# EAGLE board untitled (EAGLE 5.01), part 1 of 2
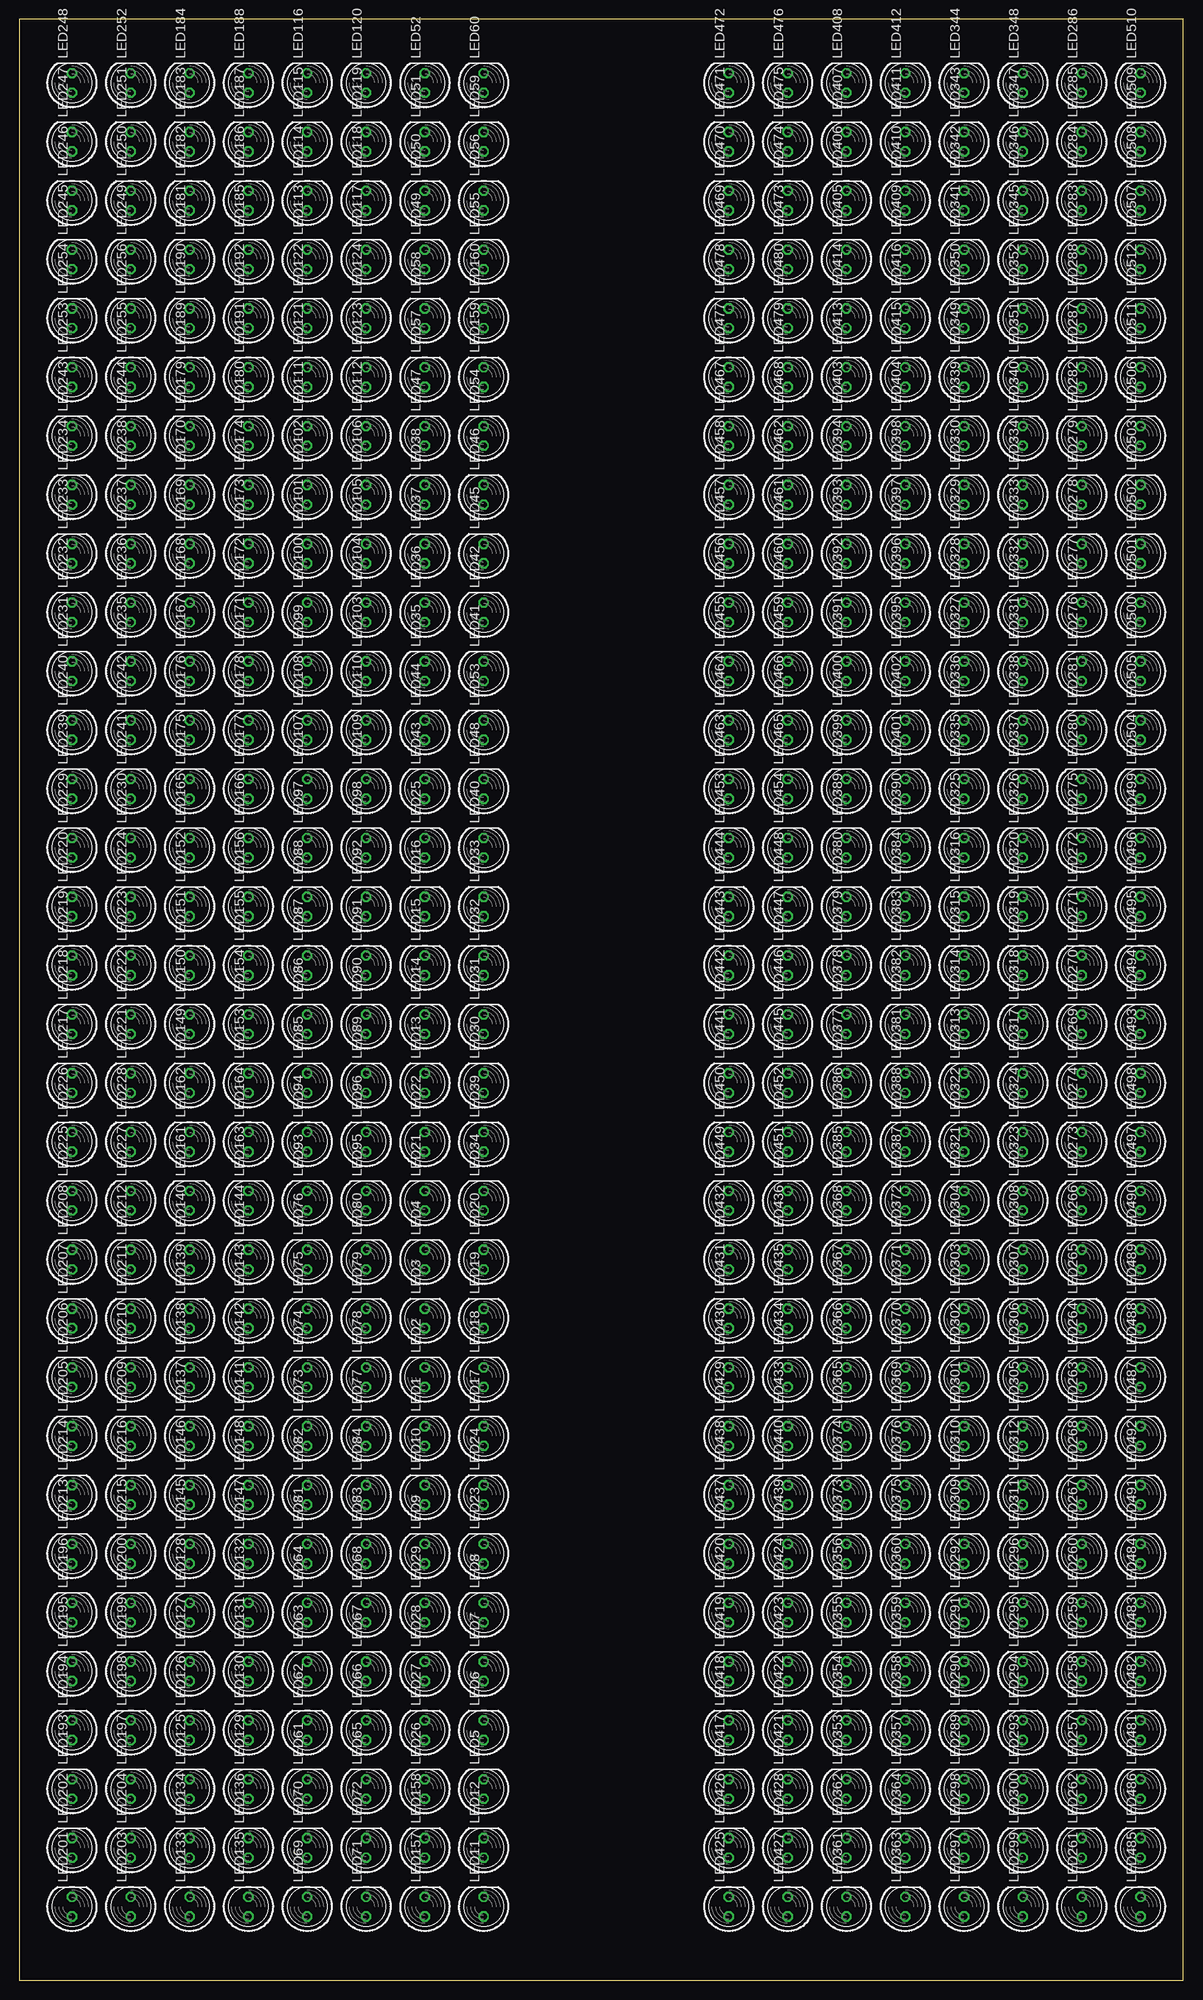
[diagram p0: board, top side]
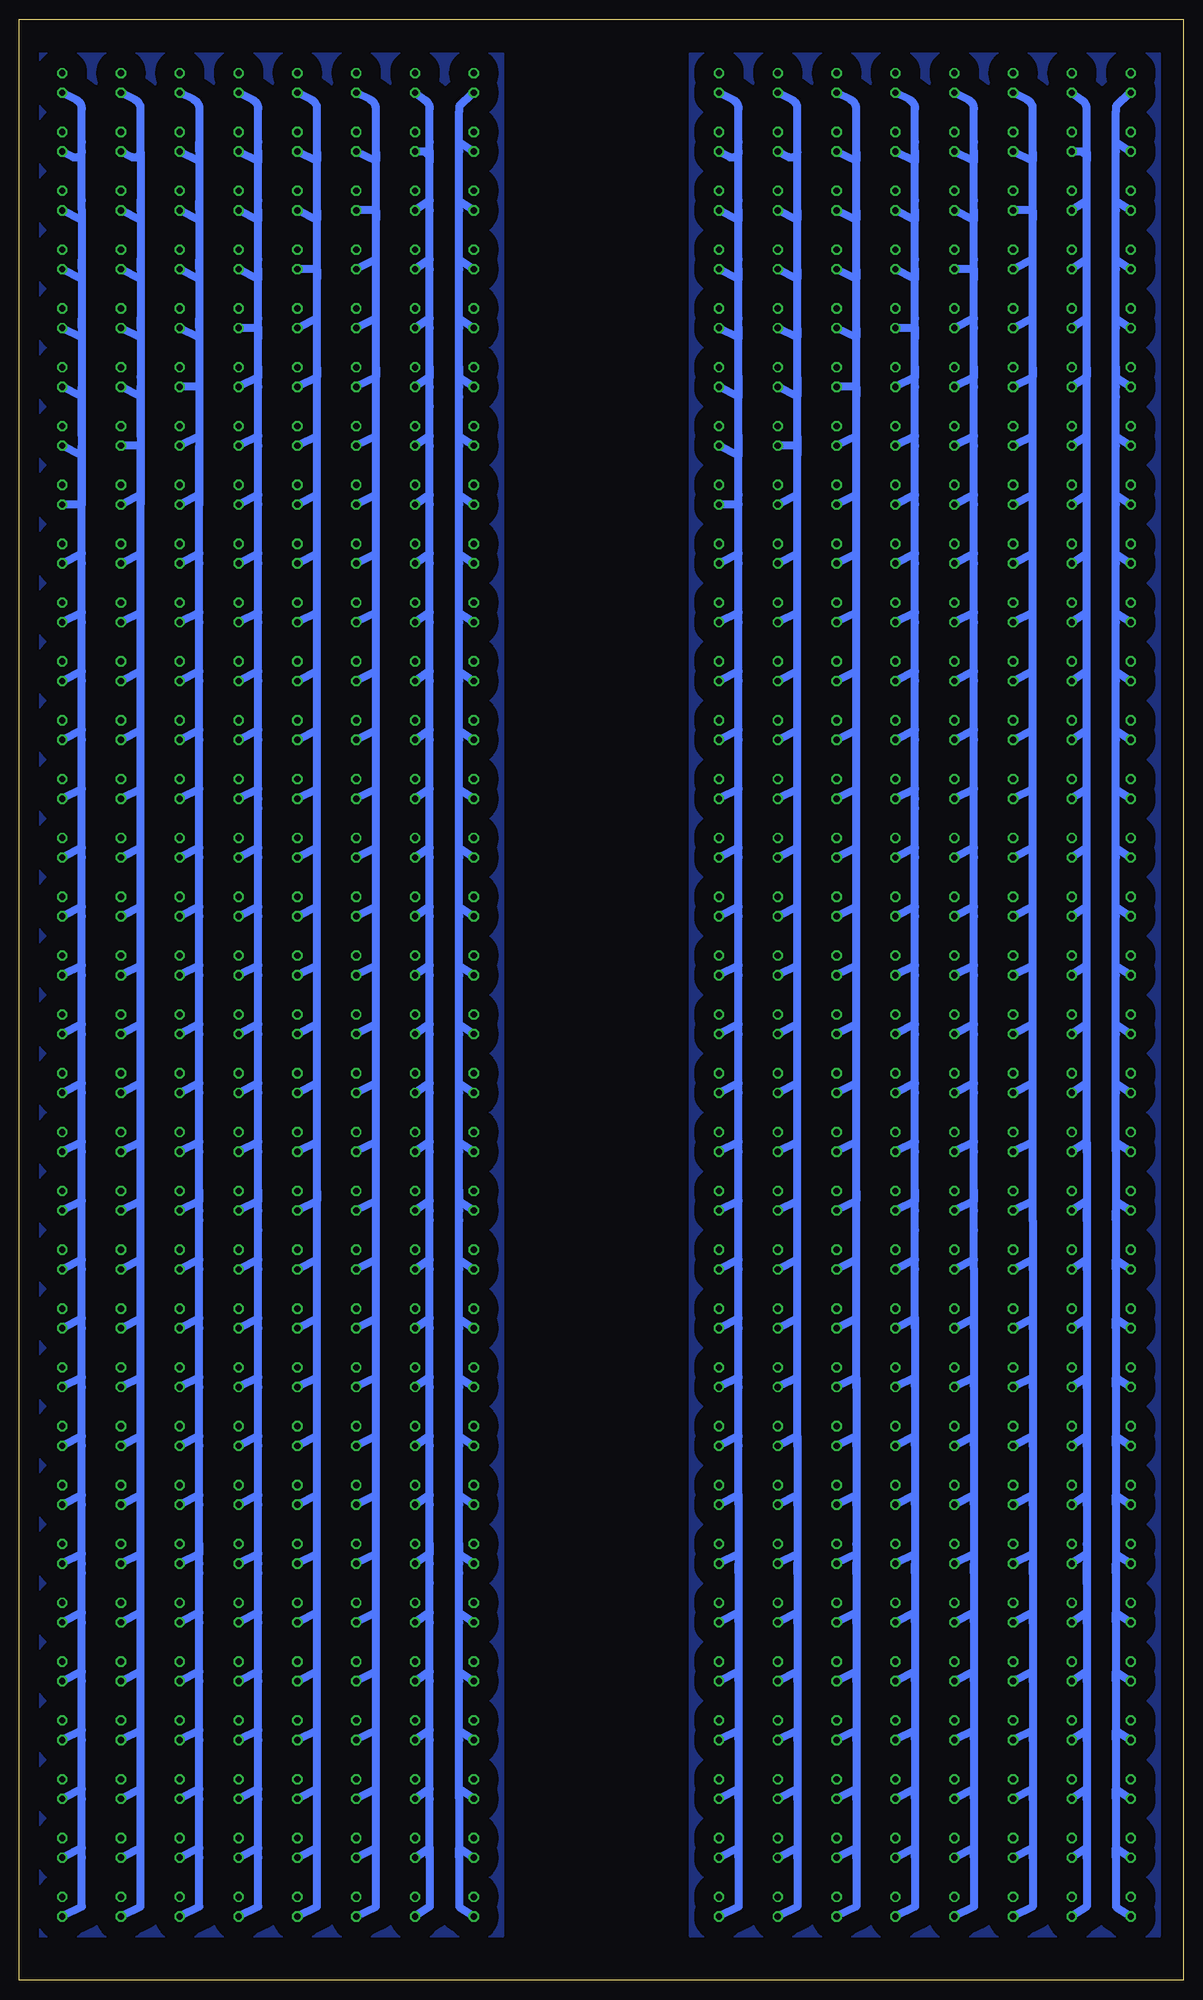
[diagram p1: board, bottom side, seen from below]

Size 150.8 x 253.98 mm. Coordinates in mm from the lower left corner, seen from the top.
Outline: 150.8,0 150.8,253.98 0,253.98 0,0 150.8,0
Copper layers (1*16): Top 0.035mm / dielectric 1.5mm / Bottom 0.035mm
Design rules "default *": minimum track width 40mil, minimum drill 24mil, track to track 8mil, track to pad 8mil, pad to pad 8mil, via to via 8mil, smd to smd 8mil, copper to edge 40mil, drill to drill 8mil, minimum pad ring 10mil, minimum via ring 8mil, stop-mask expansion 4mil, vias tented up to drill 0mil, thermal gap 10mil

## Footprints (pad centres in the part's own frame; a part is rotated, then mirrored left to right if it is on the bottom)
LED5MM = drill 0.813 octagon: A -1.27,0; K 1.27,0

## Placement (x,y rotation side)
LED1  [LED5MM]  52.54,70.48 90 top
LED2  [LED5MM]  52.54,78.1 90 top
LED3  [LED5MM]  52.54,85.72 90 top
LED4  [LED5MM]  52.54,93.34 90 top
LED5  [LED5MM]  60.16,24.76 90 top
LED6  [LED5MM]  60.16,32.38 90 top
LED7  [LED5MM]  60.16,40 90 top
LED8  [LED5MM]  60.16,47.62 90 top
LED9  [LED5MM]  52.54,55.24 90 top
LED10  [LED5MM]  52.54,62.86 90 top
LED11  [LED5MM]  60.16,9.52 90 top
LED12  [LED5MM]  60.16,17.14 90 top
LED13  [LED5MM]  52.54,116.2 90 top
LED14  [LED5MM]  52.54,123.82 90 top
LED15  [LED5MM]  52.54,131.44 90 top
LED16  [LED5MM]  52.54,139.06 90 top
LED17  [LED5MM]  60.16,70.48 90 top
LED18  [LED5MM]  60.16,78.1 90 top
LED19  [LED5MM]  60.16,85.72 90 top
LED20  [LED5MM]  60.16,93.34 90 top
LED21  [LED5MM]  52.54,100.96 90 top
LED22  [LED5MM]  52.54,108.58 90 top
LED23  [LED5MM]  60.16,55.24 90 top
LED24  [LED5MM]  60.16,62.86 90 top
LED25  [LED5MM]  52.54,146.68 90 top
LED26  [LED5MM]  52.54,24.76 90 top
LED27  [LED5MM]  52.54,32.38 90 top
LED28  [LED5MM]  52.54,40 90 top
LED29  [LED5MM]  52.54,47.62 90 top
LED30  [LED5MM]  60.16,116.2 90 top
LED31  [LED5MM]  60.16,123.82 90 top
LED32  [LED5MM]  60.16,131.44 90 top
LED33  [LED5MM]  60.16,139.06 90 top
LED34  [LED5MM]  60.16,100.96 90 top
LED35  [LED5MM]  52.54,169.54 90 top
LED36  [LED5MM]  52.54,177.16 90 top
LED37  [LED5MM]  52.54,184.78 90 top
LED38  [LED5MM]  52.54,192.4 90 top
LED39  [LED5MM]  60.16,108.58 90 top
LED40  [LED5MM]  60.16,146.68 90 top
LED41  [LED5MM]  60.16,169.54 90 top
LED42  [LED5MM]  60.16,177.16 90 top
LED43  [LED5MM]  52.54,154.3 90 top
LED44  [LED5MM]  52.54,161.92 90 top
LED45  [LED5MM]  60.16,184.78 90 top
LED46  [LED5MM]  60.16,192.4 90 top
LED47  [LED5MM]  52.54,200.02 90 top
LED48  [LED5MM]  60.16,154.3 90 top
LED49  [LED5MM]  52.54,222.88 90 top
LED50  [LED5MM]  52.54,230.5 90 top
LED51  [LED5MM]  52.54,238.12 90 top
LED52  [LED5MM]  52.54,245.74 90 top
LED53  [LED5MM]  60.16,161.92 90 top
LED54  [LED5MM]  60.16,200.02 90 top
LED55  [LED5MM]  60.16,222.88 90 top
LED56  [LED5MM]  60.16,230.5 90 top
LED57  [LED5MM]  52.54,207.64 90 top
LED58  [LED5MM]  52.54,215.26 90 top
LED59  [LED5MM]  60.16,238.12 90 top
LED60  [LED5MM]  60.16,245.74 90 top
LED61  [LED5MM]  37.3,24.76 90 top
LED62  [LED5MM]  37.3,32.38 90 top
LED63  [LED5MM]  37.3,40 90 top
LED64  [LED5MM]  37.3,47.62 90 top
LED65  [LED5MM]  44.92,24.76 90 top
LED66  [LED5MM]  44.92,32.38 90 top
LED67  [LED5MM]  44.92,40 90 top
LED68  [LED5MM]  44.92,47.62 90 top
LED69  [LED5MM]  37.3,9.52 90 top
LED70  [LED5MM]  37.3,17.14 90 top
LED71  [LED5MM]  44.92,9.52 90 top
LED72  [LED5MM]  44.92,17.14 90 top
LED73  [LED5MM]  37.3,70.48 90 top
LED74  [LED5MM]  37.3,78.1 90 top
LED75  [LED5MM]  37.3,85.72 90 top
LED76  [LED5MM]  37.3,93.34 90 top
LED77  [LED5MM]  44.92,70.48 90 top
LED78  [LED5MM]  44.92,78.1 90 top
LED79  [LED5MM]  44.92,85.72 90 top
LED80  [LED5MM]  44.92,93.34 90 top
LED81  [LED5MM]  37.3,55.24 90 top
LED82  [LED5MM]  37.3,62.86 90 top
LED83  [LED5MM]  44.92,55.24 90 top
LED84  [LED5MM]  44.92,62.86 90 top
LED85  [LED5MM]  37.3,116.2 90 top
LED86  [LED5MM]  37.3,123.82 90 top
LED87  [LED5MM]  37.3,131.44 90 top
LED88  [LED5MM]  37.3,139.06 90 top
LED89  [LED5MM]  44.92,116.2 90 top
LED90  [LED5MM]  44.92,123.82 90 top
LED91  [LED5MM]  44.92,131.44 90 top
LED92  [LED5MM]  44.92,139.06 90 top
LED93  [LED5MM]  37.3,100.96 90 top
LED94  [LED5MM]  37.3,108.58 90 top
LED95  [LED5MM]  44.92,100.96 90 top
LED96  [LED5MM]  44.92,108.58 90 top
LED97  [LED5MM]  37.3,146.68 90 top
LED98  [LED5MM]  44.92,146.68 90 top
LED99  [LED5MM]  37.3,169.54 90 top
LED100  [LED5MM]  37.3,177.16 90 top
LED101  [LED5MM]  37.3,184.78 90 top
LED102  [LED5MM]  37.3,192.4 90 top
LED103  [LED5MM]  44.92,169.54 90 top
LED104  [LED5MM]  44.92,177.16 90 top
LED105  [LED5MM]  44.92,184.78 90 top
LED106  [LED5MM]  44.92,192.4 90 top
LED107  [LED5MM]  37.3,154.3 90 top
LED108  [LED5MM]  37.3,161.92 90 top
LED109  [LED5MM]  44.92,154.3 90 top
LED110  [LED5MM]  44.92,161.92 90 top
LED111  [LED5MM]  37.3,200.02 90 top
LED112  [LED5MM]  44.92,200.02 90 top
LED113  [LED5MM]  37.3,222.88 90 top
LED114  [LED5MM]  37.3,230.5 90 top
LED115  [LED5MM]  37.3,238.12 90 top
LED116  [LED5MM]  37.3,245.74 90 top
LED117  [LED5MM]  44.92,222.88 90 top
LED118  [LED5MM]  44.92,230.5 90 top
LED119  [LED5MM]  44.92,238.12 90 top
LED120  [LED5MM]  44.92,245.74 90 top
LED121  [LED5MM]  37.3,207.64 90 top
LED122  [LED5MM]  37.3,215.26 90 top
LED123  [LED5MM]  44.92,207.64 90 top
LED124  [LED5MM]  44.92,215.26 90 top
LED125  [LED5MM]  22.06,24.76 90 top
LED126  [LED5MM]  22.06,32.38 90 top
LED127  [LED5MM]  22.06,40 90 top
LED128  [LED5MM]  22.06,47.62 90 top
LED129  [LED5MM]  29.68,24.76 90 top
LED130  [LED5MM]  29.68,32.38 90 top
LED131  [LED5MM]  29.68,40 90 top
LED132  [LED5MM]  29.68,47.62 90 top
LED133  [LED5MM]  22.06,9.52 90 top
LED134  [LED5MM]  22.06,17.14 90 top
LED135  [LED5MM]  29.68,9.52 90 top
LED136  [LED5MM]  29.68,17.14 90 top
LED137  [LED5MM]  22.06,70.48 90 top
LED138  [LED5MM]  22.06,78.1 90 top
LED139  [LED5MM]  22.06,85.72 90 top
LED140  [LED5MM]  22.06,93.34 90 top
LED141  [LED5MM]  29.68,70.48 90 top
LED142  [LED5MM]  29.68,78.1 90 top
LED143  [LED5MM]  29.68,85.72 90 top
LED144  [LED5MM]  29.68,93.34 90 top
LED145  [LED5MM]  22.06,55.24 90 top
LED146  [LED5MM]  22.06,62.86 90 top
LED147  [LED5MM]  29.68,55.24 90 top
LED148  [LED5MM]  29.68,62.86 90 top
LED149  [LED5MM]  22.06,116.2 90 top
LED150  [LED5MM]  22.06,123.82 90 top
LED151  [LED5MM]  22.06,131.44 90 top
LED152  [LED5MM]  22.06,139.06 90 top
LED153  [LED5MM]  29.68,116.2 90 top
LED154  [LED5MM]  29.68,123.82 90 top
LED155  [LED5MM]  29.68,131.44 90 top
LED156  [LED5MM]  29.68,139.06 90 top
LED157  [LED5MM]  52.54,9.52 90 top
LED158  [LED5MM]  52.54,17.14 90 top
LED159  [LED5MM]  60.16,207.64 90 top
LED160  [LED5MM]  60.16,215.26 90 top
LED161  [LED5MM]  22.06,100.96 90 top
LED162  [LED5MM]  22.06,108.58 90 top
LED163  [LED5MM]  29.68,100.96 90 top
LED164  [LED5MM]  29.68,108.58 90 top
LED165  [LED5MM]  22.06,146.68 90 top
LED166  [LED5MM]  29.68,146.68 90 top
LED167  [LED5MM]  22.06,169.54 90 top
LED168  [LED5MM]  22.06,177.16 90 top
LED169  [LED5MM]  22.06,184.78 90 top
LED170  [LED5MM]  22.06,192.4 90 top
LED171  [LED5MM]  29.68,169.54 90 top
LED172  [LED5MM]  29.68,177.16 90 top
LED173  [LED5MM]  29.68,184.78 90 top
LED174  [LED5MM]  29.68,192.4 90 top
LED175  [LED5MM]  22.06,154.3 90 top
LED176  [LED5MM]  22.06,161.92 90 top
LED177  [LED5MM]  29.68,154.3 90 top
LED178  [LED5MM]  29.68,161.92 90 top
LED179  [LED5MM]  22.06,200.02 90 top
LED180  [LED5MM]  29.68,200.02 90 top
LED181  [LED5MM]  22.06,222.88 90 top
LED182  [LED5MM]  22.06,230.5 90 top
LED183  [LED5MM]  22.06,238.12 90 top
LED184  [LED5MM]  22.06,245.74 90 top
LED185  [LED5MM]  29.68,222.88 90 top
LED186  [LED5MM]  29.68,230.5 90 top
LED187  [LED5MM]  29.68,238.12 90 top
LED188  [LED5MM]  29.68,245.74 90 top
LED189  [LED5MM]  22.06,207.64 90 top
LED190  [LED5MM]  22.06,215.26 90 top
LED191  [LED5MM]  29.68,207.64 90 top
LED192  [LED5MM]  29.68,215.26 90 top
LED193  [LED5MM]  6.82,24.76 90 top
LED194  [LED5MM]  6.82,32.38 90 top
LED195  [LED5MM]  6.82,40 90 top
LED196  [LED5MM]  6.82,47.62 90 top
LED197  [LED5MM]  14.44,24.76 90 top
LED198  [LED5MM]  14.44,32.38 90 top
LED199  [LED5MM]  14.44,40 90 top
LED200  [LED5MM]  14.44,47.62 90 top
LED201  [LED5MM]  6.82,9.52 90 top
LED202  [LED5MM]  6.82,17.14 90 top
LED203  [LED5MM]  14.44,9.52 90 top
LED204  [LED5MM]  14.44,17.14 90 top
LED205  [LED5MM]  6.82,70.48 90 top
LED206  [LED5MM]  6.82,78.1 90 top
LED207  [LED5MM]  6.82,85.72 90 top
LED208  [LED5MM]  6.82,93.34 90 top
LED209  [LED5MM]  14.44,70.48 90 top
LED210  [LED5MM]  14.44,78.1 90 top
LED211  [LED5MM]  14.44,85.72 90 top
LED212  [LED5MM]  14.44,93.34 90 top
LED213  [LED5MM]  6.82,55.24 90 top
LED214  [LED5MM]  6.82,62.86 90 top
LED215  [LED5MM]  14.44,55.24 90 top
LED216  [LED5MM]  14.44,62.86 90 top
LED217  [LED5MM]  6.82,116.2 90 top
LED218  [LED5MM]  6.82,123.82 90 top
LED219  [LED5MM]  6.82,131.44 90 top
LED220  [LED5MM]  6.82,139.06 90 top
LED221  [LED5MM]  14.44,116.2 90 top
LED222  [LED5MM]  14.44,123.82 90 top
LED223  [LED5MM]  14.44,131.44 90 top
LED224  [LED5MM]  14.44,139.06 90 top
LED225  [LED5MM]  6.82,100.96 90 top
LED226  [LED5MM]  6.82,108.58 90 top
LED227  [LED5MM]  14.44,100.96 90 top
LED228  [LED5MM]  14.44,108.58 90 top
LED229  [LED5MM]  6.82,146.68 90 top
LED230  [LED5MM]  14.44,146.68 90 top
LED231  [LED5MM]  6.82,169.54 90 top
LED232  [LED5MM]  6.82,177.16 90 top
LED233  [LED5MM]  6.82,184.78 90 top
LED234  [LED5MM]  6.82,192.4 90 top
LED235  [LED5MM]  14.44,169.54 90 top
LED236  [LED5MM]  14.44,177.16 90 top
LED237  [LED5MM]  14.44,184.78 90 top
LED238  [LED5MM]  14.44,192.4 90 top
LED239  [LED5MM]  6.82,154.3 90 top
LED240  [LED5MM]  6.82,161.92 90 top
LED241  [LED5MM]  14.44,154.3 90 top
LED242  [LED5MM]  14.44,161.92 90 top
LED243  [LED5MM]  6.82,200.02 90 top
LED244  [LED5MM]  14.44,200.02 90 top
LED245  [LED5MM]  6.82,222.88 90 top
LED246  [LED5MM]  6.82,230.5 90 top
LED247  [LED5MM]  6.82,238.12 90 top
LED248  [LED5MM]  6.82,245.74 90 top
LED249  [LED5MM]  14.44,222.88 90 top
LED250  [LED5MM]  14.44,230.5 90 top
LED251  [LED5MM]  14.44,238.12 90 top
LED252  [LED5MM]  14.44,245.74 90 top
LED253  [LED5MM]  6.82,207.64 90 top
LED254  [LED5MM]  6.82,215.26 90 top
LED255  [LED5MM]  14.44,207.64 90 top
LED256  [LED5MM]  14.44,215.26 90 top
LED257  [LED5MM]  137.63,24.76 90 top
LED258  [LED5MM]  137.63,32.38 90 top
LED259  [LED5MM]  137.63,40 90 top
LED260  [LED5MM]  137.63,47.62 90 top
LED261  [LED5MM]  137.63,9.52 90 top
LED262  [LED5MM]  137.63,17.14 90 top
LED263  [LED5MM]  137.63,70.48 90 top
LED264  [LED5MM]  137.63,78.1 90 top
LED265  [LED5MM]  137.63,85.72 90 top
LED266  [LED5MM]  137.63,93.34 90 top
LED267  [LED5MM]  137.63,55.24 90 top
LED268  [LED5MM]  137.63,62.86 90 top
LED269  [LED5MM]  137.63,116.2 90 top
LED270  [LED5MM]  137.63,123.82 90 top
LED271  [LED5MM]  137.63,131.44 90 top
LED272  [LED5MM]  137.63,139.06 90 top
LED273  [LED5MM]  137.63,100.96 90 top
LED274  [LED5MM]  137.63,108.58 90 top
LED275  [LED5MM]  137.63,146.68 90 top
LED276  [LED5MM]  137.63,169.54 90 top
LED277  [LED5MM]  137.63,177.16 90 top
LED278  [LED5MM]  137.63,184.78 90 top
LED279  [LED5MM]  137.63,192.4 90 top
LED280  [LED5MM]  137.63,154.3 90 top
LED281  [LED5MM]  137.63,161.92 90 top
LED282  [LED5MM]  137.63,200.02 90 top
LED283  [LED5MM]  137.63,222.88 90 top
LED284  [LED5MM]  137.63,230.5 90 top
LED285  [LED5MM]  137.63,238.12 90 top
LED286  [LED5MM]  137.63,245.74 90 top
LED287  [LED5MM]  137.63,207.64 90 top
LED288  [LED5MM]  137.63,215.26 90 top
LED289  [LED5MM]  122.39,24.76 90 top
LED290  [LED5MM]  122.39,32.38 90 top
LED291  [LED5MM]  122.39,40 90 top
LED292  [LED5MM]  122.39,47.62 90 top
LED293  [LED5MM]  130.01,24.76 90 top
LED294  [LED5MM]  130.01,32.38 90 top
LED295  [LED5MM]  130.01,40 90 top
LED296  [LED5MM]  130.01,47.62 90 top
LED297  [LED5MM]  122.39,9.52 90 top
LED298  [LED5MM]  122.39,17.14 90 top
LED299  [LED5MM]  130.01,9.52 90 top
LED300  [LED5MM]  130.01,17.14 90 top
LED301  [LED5MM]  122.39,70.48 90 top
LED302  [LED5MM]  122.39,78.1 90 top
LED303  [LED5MM]  122.39,85.72 90 top
LED304  [LED5MM]  122.39,93.34 90 top
LED305  [LED5MM]  130.01,70.48 90 top
LED306  [LED5MM]  130.01,78.1 90 top
LED307  [LED5MM]  130.01,85.72 90 top
LED308  [LED5MM]  130.01,93.34 90 top
LED309  [LED5MM]  122.39,55.24 90 top
LED310  [LED5MM]  122.39,62.86 90 top
LED311  [LED5MM]  130.01,55.24 90 top
LED312  [LED5MM]  130.01,62.86 90 top
LED313  [LED5MM]  122.39,116.2 90 top
LED314  [LED5MM]  122.39,123.82 90 top
LED315  [LED5MM]  122.39,131.44 90 top
LED316  [LED5MM]  122.39,139.06 90 top
LED317  [LED5MM]  130.01,116.2 90 top
LED318  [LED5MM]  130.01,123.82 90 top
LED319  [LED5MM]  130.01,131.44 90 top
LED320  [LED5MM]  130.01,139.06 90 top
LED321  [LED5MM]  122.39,100.96 90 top
LED322  [LED5MM]  122.39,108.58 90 top
LED323  [LED5MM]  130.01,100.96 90 top
LED324  [LED5MM]  130.01,108.58 90 top
LED325  [LED5MM]  122.39,146.68 90 top
LED326  [LED5MM]  130.01,146.68 90 top
LED327  [LED5MM]  122.39,169.54 90 top
LED328  [LED5MM]  122.39,177.16 90 top
LED329  [LED5MM]  122.39,184.78 90 top
LED330  [LED5MM]  122.39,192.4 90 top
LED331  [LED5MM]  130.01,169.54 90 top
LED332  [LED5MM]  130.01,177.16 90 top
LED333  [LED5MM]  130.01,184.78 90 top
LED334  [LED5MM]  130.01,192.4 90 top
LED335  [LED5MM]  122.39,154.3 90 top
LED336  [LED5MM]  122.39,161.92 90 top
LED337  [LED5MM]  130.01,154.3 90 top
LED338  [LED5MM]  130.01,161.92 90 top
LED339  [LED5MM]  122.39,200.02 90 top
LED340  [LED5MM]  130.01,200.02 90 top
LED341  [LED5MM]  122.39,222.88 90 top
LED342  [LED5MM]  122.39,230.5 90 top
LED343  [LED5MM]  122.39,238.12 90 top
LED344  [LED5MM]  122.39,245.74 90 top
LED345  [LED5MM]  130.01,222.88 90 top
LED346  [LED5MM]  130.01,230.5 90 top
LED347  [LED5MM]  130.01,238.12 90 top
LED348  [LED5MM]  130.01,245.74 90 top
LED349  [LED5MM]  122.39,207.64 90 top
LED350  [LED5MM]  122.39,215.26 90 top
LED351  [LED5MM]  130.01,207.64 90 top
LED352  [LED5MM]  130.01,215.26 90 top
LED353  [LED5MM]  107.15,24.76 90 top
LED354  [LED5MM]  107.15,32.38 90 top
LED355  [LED5MM]  107.15,40 90 top
LED356  [LED5MM]  107.15,47.62 90 top
LED357  [LED5MM]  114.77,24.76 90 top
LED358  [LED5MM]  114.77,32.38 90 top
LED359  [LED5MM]  114.77,40 90 top
LED360  [LED5MM]  114.77,47.62 90 top
LED361  [LED5MM]  107.15,9.52 90 top
LED362  [LED5MM]  107.15,17.14 90 top
LED363  [LED5MM]  114.77,9.52 90 top
LED364  [LED5MM]  114.77,17.14 90 top
LED365  [LED5MM]  107.15,70.48 90 top
LED366  [LED5MM]  107.15,78.1 90 top
LED367  [LED5MM]  107.15,85.72 90 top
LED368  [LED5MM]  107.15,93.34 90 top
LED369  [LED5MM]  114.77,70.48 90 top
LED370  [LED5MM]  114.77,78.1 90 top
LED371  [LED5MM]  114.77,85.72 90 top
LED372  [LED5MM]  114.77,93.34 90 top
LED373  [LED5MM]  107.15,55.24 90 top
LED374  [LED5MM]  107.15,62.86 90 top
LED375  [LED5MM]  114.77,55.24 90 top
LED376  [LED5MM]  114.77,62.86 90 top
LED377  [LED5MM]  107.15,116.2 90 top
LED378  [LED5MM]  107.15,123.82 90 top
LED379  [LED5MM]  107.15,131.44 90 top
LED380  [LED5MM]  107.15,139.06 90 top
LED381  [LED5MM]  114.77,116.2 90 top
LED382  [LED5MM]  114.77,123.82 90 top
LED383  [LED5MM]  114.77,131.44 90 top
LED384  [LED5MM]  114.77,139.06 90 top
LED385  [LED5MM]  107.15,100.96 90 top
LED386  [LED5MM]  107.15,108.58 90 top
LED387  [LED5MM]  114.77,100.96 90 top
LED388  [LED5MM]  114.77,108.58 90 top
LED389  [LED5MM]  107.15,146.68 90 top
LED390  [LED5MM]  114.77,146.68 90 top
LED391  [LED5MM]  107.15,169.54 90 top
LED392  [LED5MM]  107.15,177.16 90 top
LED393  [LED5MM]  107.15,184.78 90 top
LED394  [LED5MM]  107.15,192.4 90 top
LED395  [LED5MM]  114.77,169.54 90 top
LED396  [LED5MM]  114.77,177.16 90 top
LED397  [LED5MM]  114.77,184.78 90 top
LED398  [LED5MM]  114.77,192.4 90 top
LED399  [LED5MM]  107.15,154.3 90 top
LED400  [LED5MM]  107.15,161.92 90 top
LED401  [LED5MM]  114.77,154.3 90 top
LED402  [LED5MM]  114.77,161.92 90 top
LED403  [LED5MM]  107.15,200.02 90 top
LED404  [LED5MM]  114.77,200.02 90 top
LED405  [LED5MM]  107.15,222.88 90 top
LED406  [LED5MM]  107.15,230.5 90 top
LED407  [LED5MM]  107.15,238.12 90 top
LED408  [LED5MM]  107.15,245.74 90 top
LED409  [LED5MM]  114.77,222.88 90 top
LED410  [LED5MM]  114.77,230.5 90 top
LED411  [LED5MM]  114.77,238.12 90 top
LED412  [LED5MM]  114.77,245.74 90 top
LED413  [LED5MM]  107.15,207.64 90 top
LED414  [LED5MM]  107.15,215.26 90 top
LED415  [LED5MM]  114.77,207.64 90 top
LED416  [LED5MM]  114.77,215.26 90 top
LED417  [LED5MM]  91.91,24.76 90 top
LED418  [LED5MM]  91.91,32.38 90 top
LED419  [LED5MM]  91.91,40 90 top
LED420  [LED5MM]  91.91,47.62 90 top
LED421  [LED5MM]  99.53,24.76 90 top
LED422  [LED5MM]  99.53,32.38 90 top
LED423  [LED5MM]  99.53,40 90 top
LED424  [LED5MM]  99.53,47.62 90 top
LED425  [LED5MM]  91.91,9.52 90 top
LED426  [LED5MM]  91.91,17.14 90 top
LED427  [LED5MM]  99.53,9.52 90 top
LED428  [LED5MM]  99.53,17.14 90 top
LED429  [LED5MM]  91.91,70.48 90 top
LED430  [LED5MM]  91.91,78.1 90 top
LED431  [LED5MM]  91.91,85.72 90 top
LED432  [LED5MM]  91.91,93.34 90 top
LED433  [LED5MM]  99.53,70.48 90 top
LED434  [LED5MM]  99.53,78.1 90 top
LED435  [LED5MM]  99.53,85.72 90 top
LED436  [LED5MM]  99.53,93.34 90 top
LED437  [LED5MM]  91.91,55.24 90 top
LED438  [LED5MM]  91.91,62.86 90 top
LED439  [LED5MM]  99.53,55.24 90 top
LED440  [LED5MM]  99.53,62.86 90 top
LED441  [LED5MM]  91.91,116.2 90 top
LED442  [LED5MM]  91.91,123.82 90 top
LED443  [LED5MM]  91.91,131.44 90 top
LED444  [LED5MM]  91.91,139.06 90 top
LED445  [LED5MM]  99.53,116.2 90 top
LED446  [LED5MM]  99.53,123.82 90 top
LED447  [LED5MM]  99.53,131.44 90 top
LED448  [LED5MM]  99.53,139.06 90 top
LED449  [LED5MM]  91.91,100.96 90 top
LED450  [LED5MM]  91.91,108.58 90 top
LED451  [LED5MM]  99.53,100.96 90 top
LED452  [LED5MM]  99.53,108.58 90 top
LED453  [LED5MM]  91.91,146.68 90 top
LED454  [LED5MM]  99.53,146.68 90 top
LED455  [LED5MM]  91.91,169.54 90 top
LED456  [LED5MM]  91.91,177.16 90 top
LED457  [LED5MM]  91.91,184.78 90 top
LED458  [LED5MM]  91.91,192.4 90 top
LED459  [LED5MM]  99.53,169.54 90 top
LED460  [LED5MM]  99.53,177.16 90 top
LED461  [LED5MM]  99.53,184.78 90 top
LED462  [LED5MM]  99.53,192.4 90 top
LED463  [LED5MM]  91.91,154.3 90 top
LED464  [LED5MM]  91.91,161.92 90 top
LED465  [LED5MM]  99.53,154.3 90 top
LED466  [LED5MM]  99.53,161.92 90 top
LED467  [LED5MM]  91.91,200.02 90 top
LED468  [LED5MM]  99.53,200.02 90 top
LED469  [LED5MM]  91.91,222.88 90 top
LED470  [LED5MM]  91.91,230.5 90 top
LED471  [LED5MM]  91.91,238.12 90 top
LED472  [LED5MM]  91.91,245.74 90 top
LED473  [LED5MM]  99.53,222.88 90 top
LED474  [LED5MM]  99.53,230.5 90 top
LED475  [LED5MM]  99.53,238.12 90 top
LED476  [LED5MM]  99.53,245.74 90 top
LED477  [LED5MM]  91.91,207.64 90 top
LED478  [LED5MM]  91.91,215.26 90 top
LED479  [LED5MM]  99.53,207.64 90 top
LED480  [LED5MM]  99.53,215.26 90 top
LED481  [LED5MM]  145.25,24.76 90 top
LED482  [LED5MM]  145.25,32.38 90 top
LED483  [LED5MM]  145.25,40 90 top
LED484  [LED5MM]  145.25,47.62 90 top
LED485  [LED5MM]  145.25,9.52 90 top
LED486  [LED5MM]  145.25,17.14 90 top
LED487  [LED5MM]  145.25,70.48 90 top
LED488  [LED5MM]  145.25,78.1 90 top
LED489  [LED5MM]  145.25,85.72 90 top
LED490  [LED5MM]  145.25,93.34 90 top
LED491  [LED5MM]  145.25,55.24 90 top
LED492  [LED5MM]  145.25,62.86 90 top
LED493  [LED5MM]  145.25,116.2 90 top
LED494  [LED5MM]  145.25,123.82 90 top
LED495  [LED5MM]  145.25,131.44 90 top
LED496  [LED5MM]  145.25,139.06 90 top
LED497  [LED5MM]  145.25,100.96 90 top
LED498  [LED5MM]  145.25,108.58 90 top
LED499  [LED5MM]  145.25,146.68 90 top
LED500  [LED5MM]  145.25,169.54 90 top
LED501  [LED5MM]  145.25,177.16 90 top
LED502  [LED5MM]  145.25,184.78 90 top
LED503  [LED5MM]  145.25,192.4 90 top
LED504  [LED5MM]  145.25,154.3 90 top
LED505  [LED5MM]  145.25,161.92 90 top
LED506  [LED5MM]  145.25,200.02 90 top
LED507  [LED5MM]  145.25,222.88 90 top
LED508  [LED5MM]  145.25,230.5 90 top
LED509  [LED5MM]  145.25,238.12 90 top
LED510  [LED5MM]  145.25,245.74 90 top
LED511  [LED5MM]  145.25,207.64 90 top
LED512  [LED5MM]  145.25,215.26 90 top

## Library data of the parts
LED1-LED512 = led

## Nets
S$1: LED1.A LED2.A LED3.A LED4.A LED9.A LED10.A LED13.A LED14.A LED15.A LED16.A LED21.A LED22.A LED26.A LED27.A LED28.A LED29.A LED157.A LED158.A
S$2: LED5.A LED6.A LED7.A LED8.A LED11.A LED12.A LED17.A LED18.A LED19.A LED20.A LED23.A LED24.A LED30.A LED31.A LED32.A LED33.A LED34.A LED39.A
S$3: LED40.A LED41.A LED42.A LED45.A LED46.A LED48.A LED53.A
S$4: LED54.A LED55.A LED56.A LED59.A LED60.A LED159.A LED160.A
S$7: LED25.A LED35.A LED36.A LED37.A LED38.A LED43.A LED44.A
S$8: LED257.A LED258.A LED259.A LED260.A LED261.A LED262.A LED263.A LED264.A LED265.A LED266.A LED267.A LED268.A LED269.A LED270.A LED271.A LED272.A LED273.A LED274.A
S$9: LED275.A LED276.A LED277.A LED278.A LED279.A LED280.A LED281.A
S$10: LED282.A LED283.A LED284.A LED285.A LED286.A LED287.A LED288.A
S$11: LED47.A LED49.A LED50.A LED51.A LED52.A LED57.A LED58.A
S$12: LED289.A LED290.A LED291.A LED292.A LED297.A LED298.A LED301.A LED302.A LED303.A LED304.A LED309.A LED310.A LED313.A LED314.A LED315.A LED316.A LED321.A LED322.A
S$14: LED325.A LED327.A LED328.A LED329.A LED330.A LED335.A LED336.A
S$15: LED61.A LED62.A LED63.A LED64.A LED69.A LED70.A LED73.A LED74.A LED75.A LED76.A LED81.A LED82.A LED85.A LED86.A LED87.A LED88.A LED93.A LED94.A
S$18: LED339.A LED341.A LED342.A LED343.A LED344.A LED349.A LED350.A
S$20: LED353.A LED354.A LED355.A LED356.A LED361.A LED362.A LED365.A LED366.A LED367.A LED368.A LED373.A LED374.A LED377.A LED378.A LED379.A LED380.A LED385.A LED386.A
S$21: LED97.A LED99.A LED100.A LED101.A LED102.A LED107.A LED108.A
S$24: LED389.A LED391.A LED392.A LED393.A LED394.A LED399.A LED400.A
S$25: LED111.A LED113.A LED114.A LED115.A LED116.A LED121.A LED122.A
S$28: LED403.A LED405.A LED406.A LED407.A LED408.A LED413.A LED414.A
S$29: LED125.A LED126.A LED127.A LED128.A LED133.A LED134.A LED137.A LED138.A LED139.A LED140.A LED145.A LED146.A LED149.A LED150.A LED151.A LED152.A LED161.A LED162.A
S$33: LED453.A LED455.A LED456.A LED457.A LED458.A LED463.A LED464.A
S$35: LED165.A LED167.A LED168.A LED169.A LED170.A LED175.A LED176.A
S$38: LED417.A LED418.A LED419.A LED420.A LED425.A LED426.A LED429.A LED430.A LED431.A LED432.A LED437.A LED438.A LED441.A LED442.A LED443.A LED444.A LED449.A LED450.A
S$39: LED179.A LED181.A LED182.A LED183.A LED184.A LED189.A LED190.A
S$41: LED481.A LED482.A LED483.A LED484.A LED485.A LED486.A LED487.A LED488.A LED489.A LED490.A LED491.A LED492.A LED493.A LED494.A LED495.A LED496.A LED497.A LED498.A
S$42: LED499.A LED500.A LED501.A LED502.A LED503.A LED504.A LED505.A
S$43: LED506.A LED507.A LED508.A LED509.A LED510.A LED511.A LED512.A
S$45: LED467.A LED469.A LED470.A LED471.A LED477.A LED478.A
S$49: LED229.A LED231.A LED232.A LED233.A LED234.A LED239.A LED240.A
S$53: LED243.A LED245.A LED246.A LED247.A LED253.A LED254.A
S$84: LED193.A LED194.A LED195.A LED196.A LED201.A LED202.A LED205.A LED206.A LED207.A LED208.A LED213.A LED214.A LED217.A LED218.A LED219.A LED220.A LED225.A LED226.A